# Altium PCB Middle Layer.PcbDoc
Units mm, origin at the board's own origin, x right, y up, seen from the top; angles counter-clockwise.
Board outline 59 x 59 mm, 2 copper layers (Top Layer, Bottom Layer); 7 components, 24 nets, 44 pads, 0 vias.
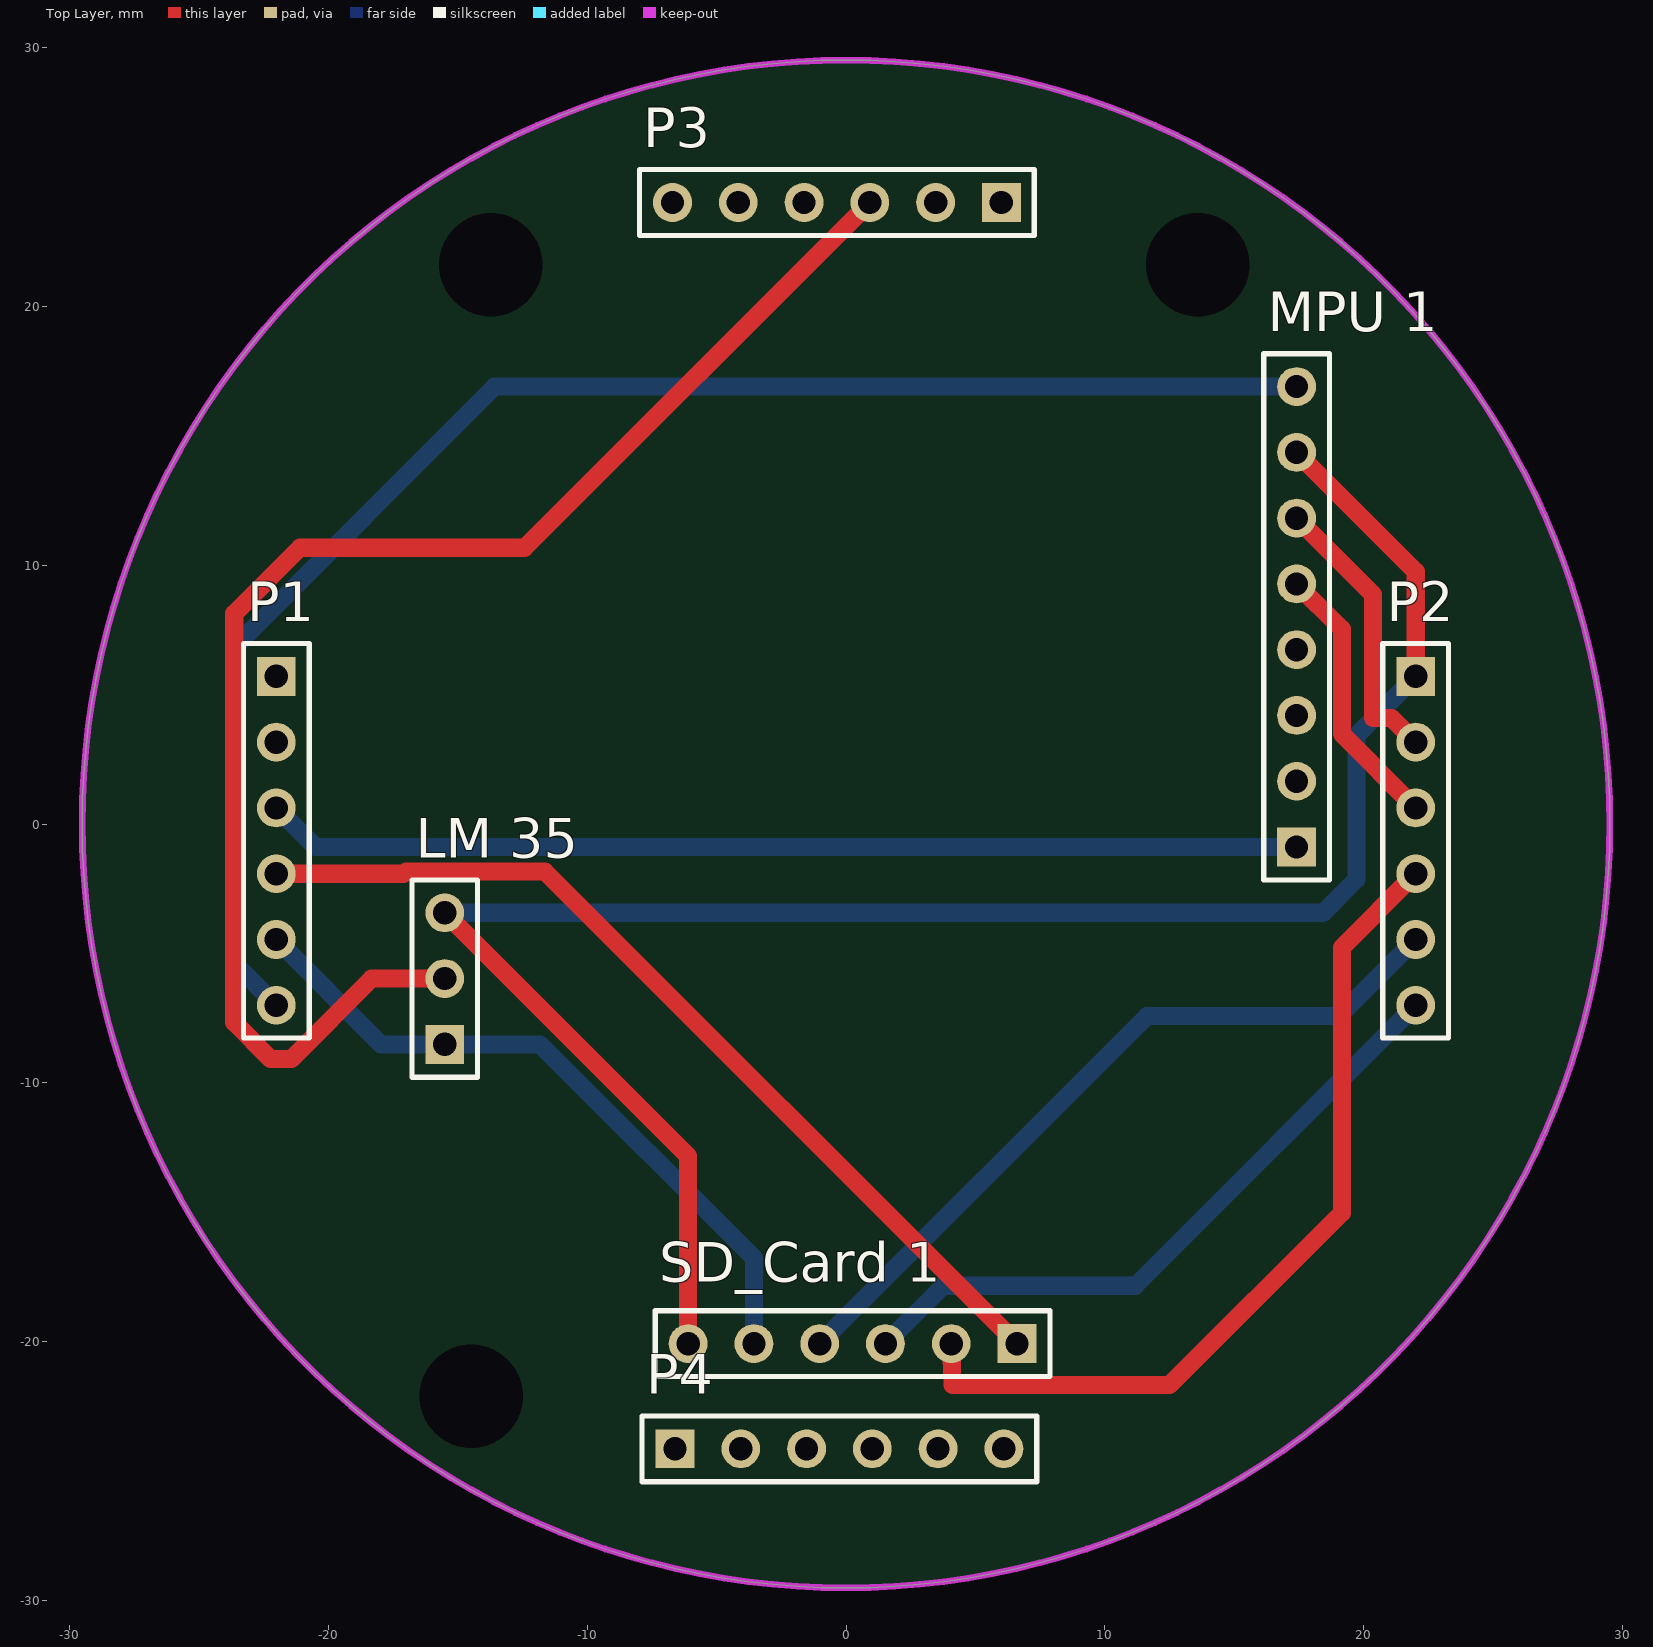
[diagram p0: Top Layer view]
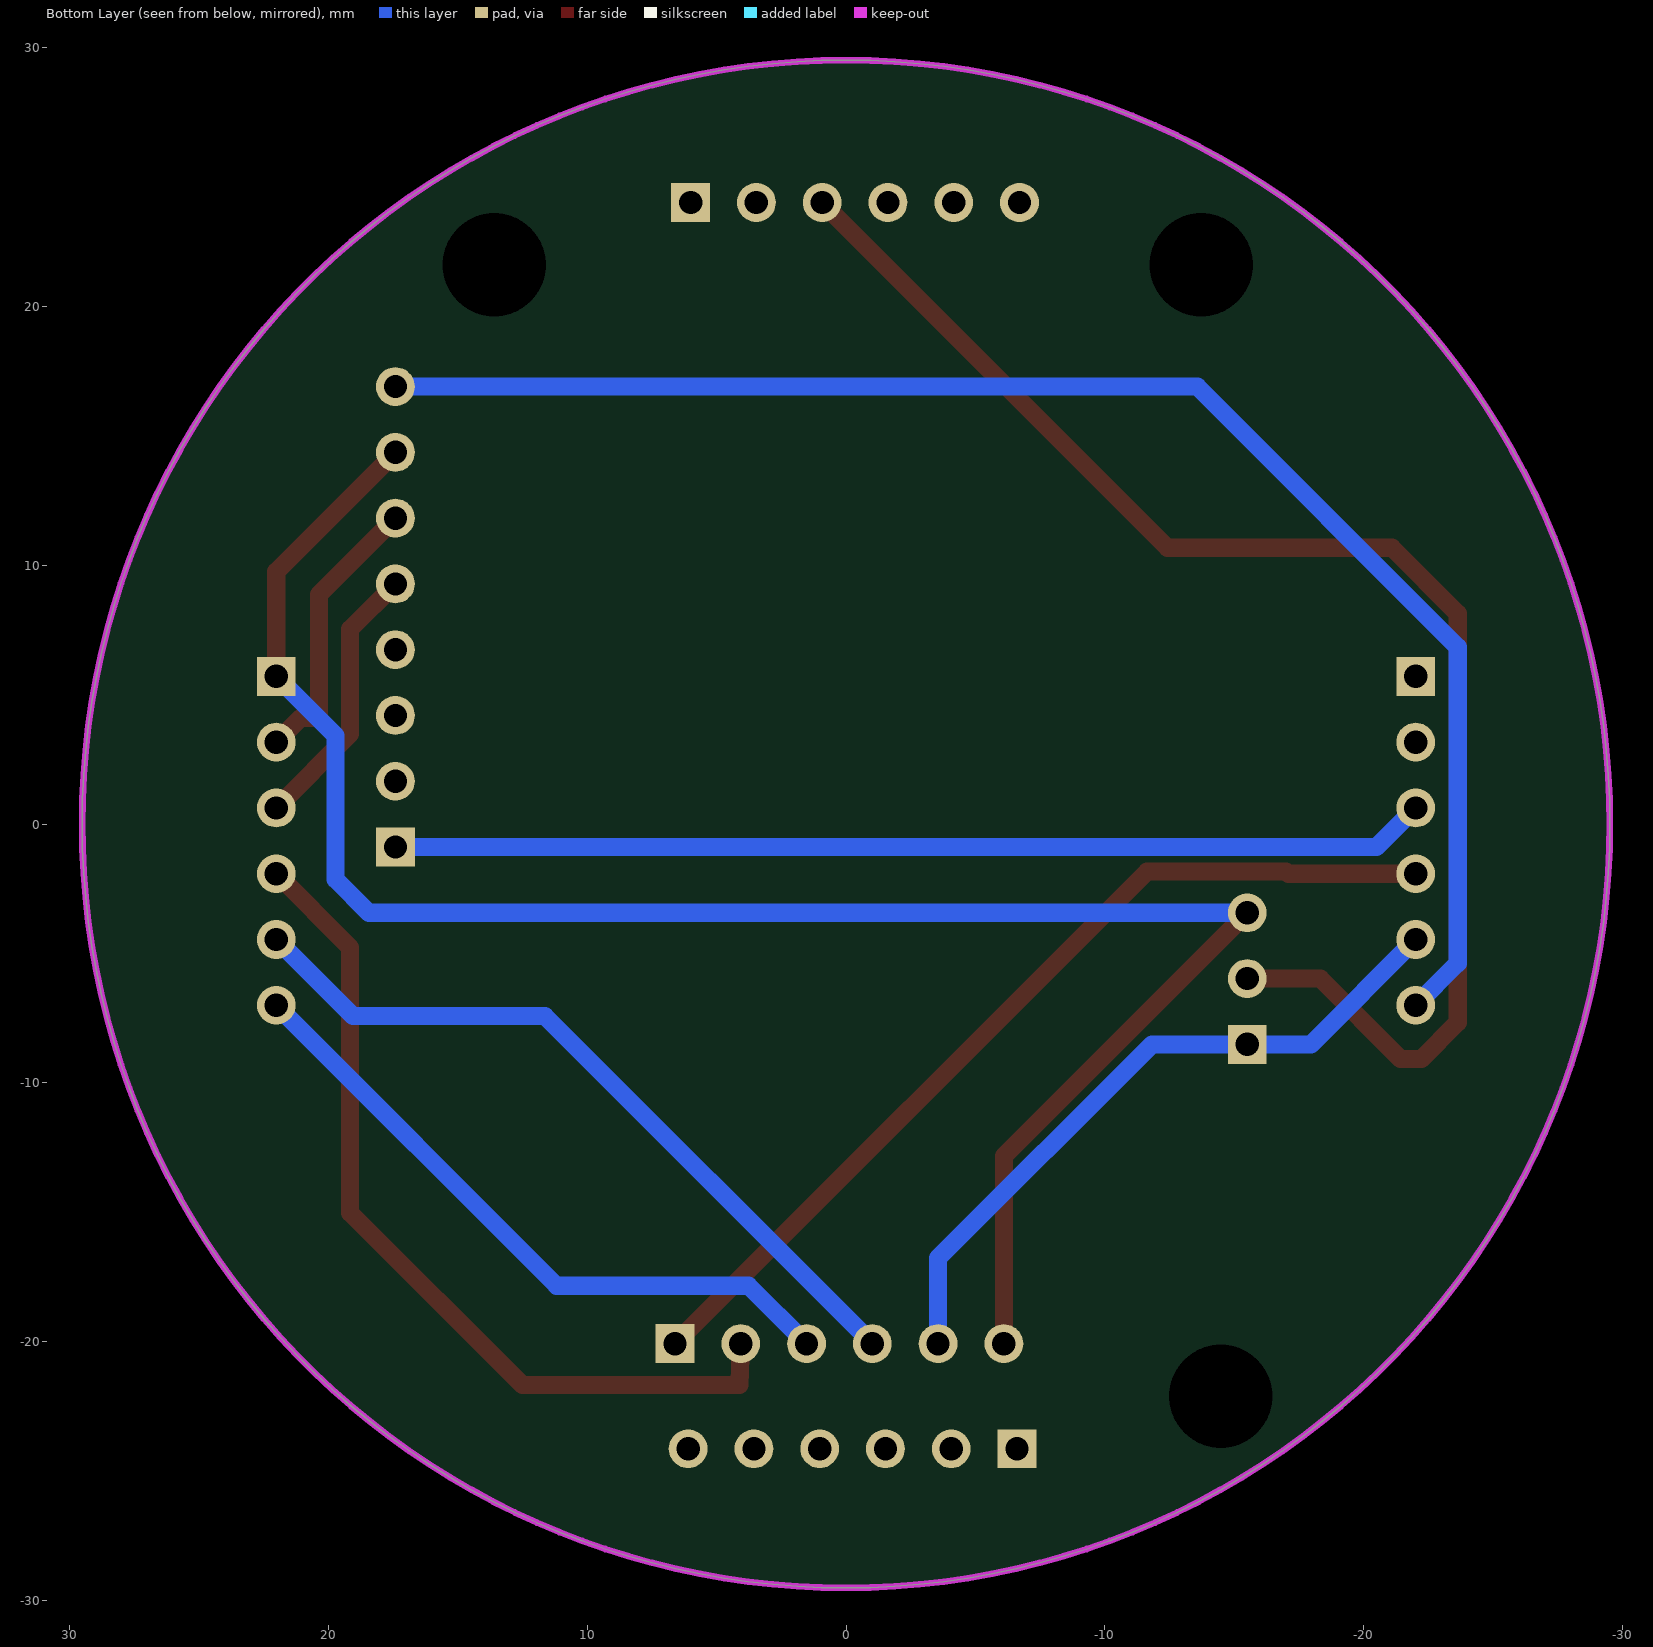
[diagram p1: Bottom Layer view, seen from below]

## Layer stack, top to bottom
Top Solder: solder mask 0.0102, Solder Resist, Dk 3.5
Top Layer: signal copper 0.0356
Dielectric 1: dielectric 0.32, FR-4, Dk 4.8
Bottom Layer: signal copper 0.0356
Bottom Solder: solder mask 0.0102, Solder Resist, Dk 3.5

## Board outline
-29.5,0 ccw(c0,0) 0,-29.5 ccw(c0,0) 29.5,0 ccw(c0,0) 0,29.5 ccw(c0,0)

## Design rules (kind name [scope] priority, off if disabled: settings)
Clearance [All] p1: gap=0.5 ignorepadtopadclearanceinfootprint=FALSE
ComponentClearance [All] p1: gap=0 collisioncheckmode=3 verticalgap=0 showdistances=FALSE
PolygonConnect [All] p1: connectstyle=Relief reliefconductorwidth=0.254 reliefentries=4 polygonreliefangle="90 Angle" airgapwidth=0.254
RoutingVias [All] p1: holewidth=0.711 width=1.27 viastyle="Through Hole" minholewidth=0.711 minwidth=1.27 maxholewidth=0.711 maxwidth=1.27
SolderMaskExpansion [All] p1: expansion=0.102
Width [All] p1: maxlimit=1 minlimit=0.5 preferedwidth=0.7
29 further rules are at their usual default settings.

## Components (designator, comment, footprint, x,y, rotation, side; value= is the part's Value field where it differs from the comment)
"LM 35" "Header 3" HDR1X3 -15.494,-8.509 r90 top
"MPU 1" "Header 8" HDR1X8 17.399,-0.889 r90 top
P1 "Header 6" HDR1X6 -22,5.7 r270 top
P2 "Header 6" HDR1X6 22,5.7 r270 top
P3 "Header 6" HDR1X6 6,24 r180 top
P4 "Header 6" HDR1X6 -6.604,-24.127 r0 top
"SD_Card 1" "Header 6" HDR1X6 6.604,-20.066 r180 top

## Footprints (in the part's own frame and the unit in brackets; to place one, negate y for a bottom-side part, rotate by r counter-clockwise, add the part's x,y. Pads: shape width x height; smd on the part's side, far side on the other; paste and mask are expansions set on the pad)
HDR1X3 [mm] "Connector; Header; 3 Position"
  rect 1.5x1.5 hole 0.9: 1(0,0)
  round 1.5 hole 0.9: 2(2.54,0) 3(5.08,0)
  silkscreen extent -1.27,-1.27 6.35,1.27
HDR1X6 [mm] "Connector; Header; 6 Position"
  rect 1.5x1.5 hole 0.9: 1(0,0)
  round 1.5 hole 0.9: 2(2.54,0) 3(5.08,0) 4(7.62,0) 5(10.16,0) 6(12.7,0)
  silkscreen extent -1.27,-1.27 13.97,1.27
HDR1X8 [mm] "Connector; Header; 8 Position"
  rect 1.5x1.5 hole 0.9: 1(0,0)
  round 1.5 hole 0.9: 2(2.54,0) 3(5.08,0) 4(7.62,0) 5(10.16,0) 6(12.7,0) 7(15.24,0) 8(17.78,0)
  silkscreen extent -1.27,-1.27 19.05,1.27

## Part data
"LM 35": "Header, 3-Pin", LatestRevisionDate=17-Jul-2002, LatestRevisionNote="Re-released for DXP Platform.", Publisher="Altium Limited"
"MPU 1": "Header, 8-Pin", LatestRevisionDate=17-Jul-2002, LatestRevisionNote="Re-released for DXP Platform.", Publisher="Altium Limited"
P1 P2 P3 P4 "SD_Card 1": "Header, 6-Pin", LatestRevisionDate=17-Jul-2002, LatestRevisionNote="Re-released for DXP Platform.", Publisher="Altium Limited"

## Free pads (board coordinates)
  round 0 hole 4: 2(-14.478,-22.098) 2(-13.716,21.59) 2(13.589,21.59)

## Nets (pads, with @x,y where several pads share a name; then routed paths per layer and width w, separated by ;. In a path a pad name is that pad's centre, name@x,y a point inside that pad or via, vN(x,y) a via of type N, cw(c..) or ccw(c..) an arc to the next point about the centre after c; other vN are vias at no path point)
"3.3 volt": "MPU 1.8" P1.6 | length 59.7
  Bottom Layer w0.7: P1.6 -23.622,-5.378 -23.622,6.833 -13.564,16.891 17.399,16.891
"5 volt": "LM 35.1" "SD_Card 1.5" P1.5 | length 26.8
  Bottom Layer w0.7: P1.5 -17.951,-8.509 -15.494,-8.509 -11.811,-8.509 -3.556,-16.764 -3.556,-20.066
"Analog 0": P3.5
"Analog 1": P3.4
"Analog 2": "LM 35.2" P3.3 | length 56.9
  Top Layer w0.7: -15.494,-5.969 -18.313,-5.969 -21.412,-9.068 -22.225,-9.068 -23.622,-7.671 -23.622,8.128 -21.082,10.668 -12.412,10.668 P3.3
"Analog 3": P3.2
AREF: P3.6
CS: "SD_Card 1.1" P1.4 | length 36.2
  Top Layer w0.7: P1.4 -17.084,-1.92 -16.993,-1.829 -11.633,-1.829 6.604,-20.066
"Digital 3": P3.1
"Digital 5": P4.1
"Digital 6": P4.2
"Digital 7": P4.3
"Digital 8": P4.4
"Digital 9": P4.5
"Digital 10": P4.6
GND: "LM 35.3" "MPU 1.7" "SD_Card 1.6" P2.1 | length 75.6
  Top Layer w0.7: -15.494,-3.429 -6.096,-12.827 -6.096,-20.066 ; 17.399,14.351 22,9.75 P2.1
  Bottom Layer w0.7: -15.494,-3.429 18.415,-3.429 19.71,-2.134 19.71,3.41 P2.1
INT: "MPU 1.1" P1.3 | length 40
  Bottom Layer w0.7: P1.3 -20.491,-0.889 17.399,-0.889
MISO: "SD_Card 1.4" P2.5 | length 29.5
  Bottom Layer w0.7: -1.016,-20.066 11.633,-7.417 19.043,-7.417 P2.5
MOSI: "SD_Card 1.3" P2.6 | length 25.9
  Bottom Layer w0.7: 1.524,-20.066 3.759,-17.831 11.169,-17.831 P2.6
RX: P1.1
SCK: "SD_Card 1.2" P2.4 | length 33.7
  Top Layer w0.7: 4.064,-20.066 4.115,-21.666 12.497,-21.666 19.152,-15.011 19.152,-4.768 P2.4
SCL: "MPU 1.6" P2.2 | length 11
  Top Layer w0.7: 17.399,11.811 20.35,8.86 20.35,4.089 21.071,4.089 P2.2
SDA: "MPU 1.5" P2.3 | length 10.6
  Top Layer w0.7: 17.399,9.271 19.15,7.52 19.15,3.47 P2.3
TX: P1.2
pads on no net: "MPU 1.2" "MPU 1.3" "MPU 1.4"

## Keep-outs
Keep-Out Layer:
  circle w0.254: c0,0 r29.5